# EAGLE board Keg Cop - Daisy Chain (EAGLE 9.6.2)
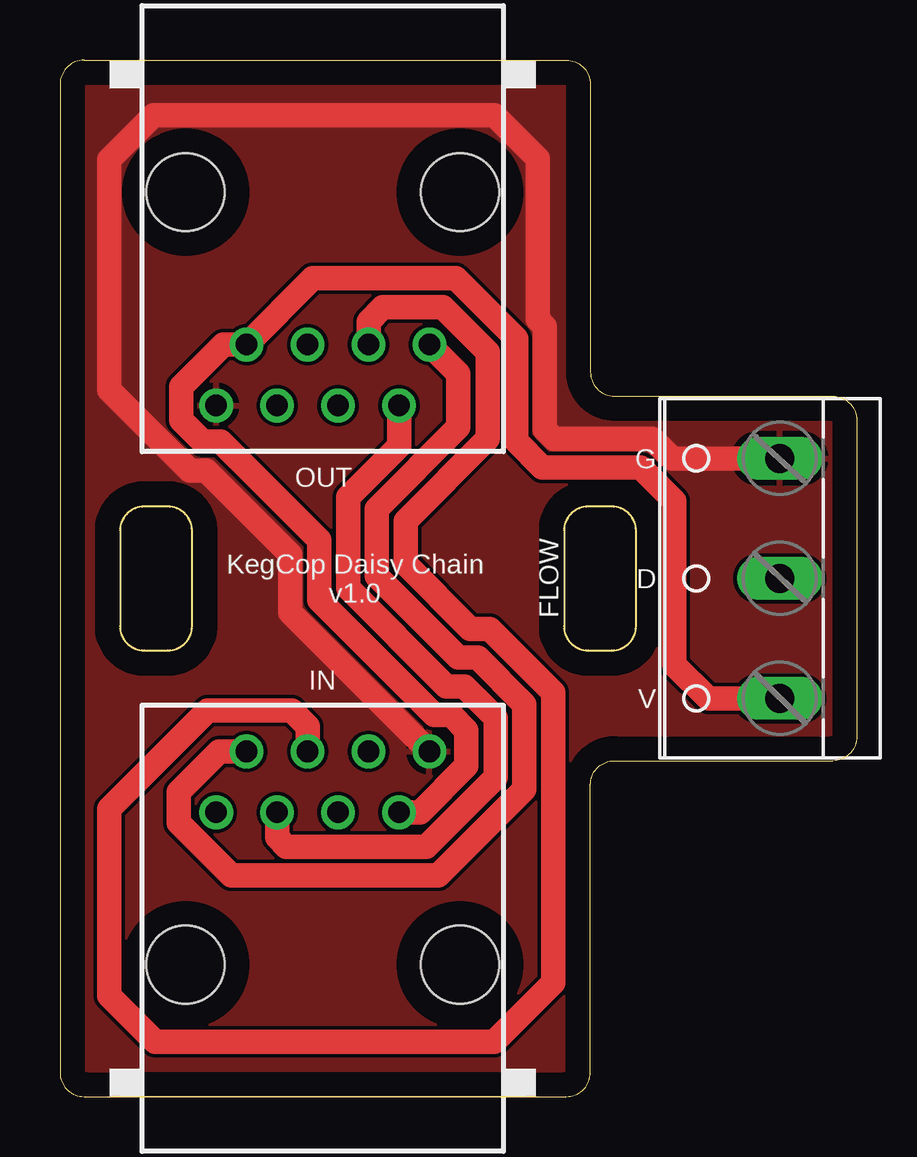
[diagram p0: board, top side]
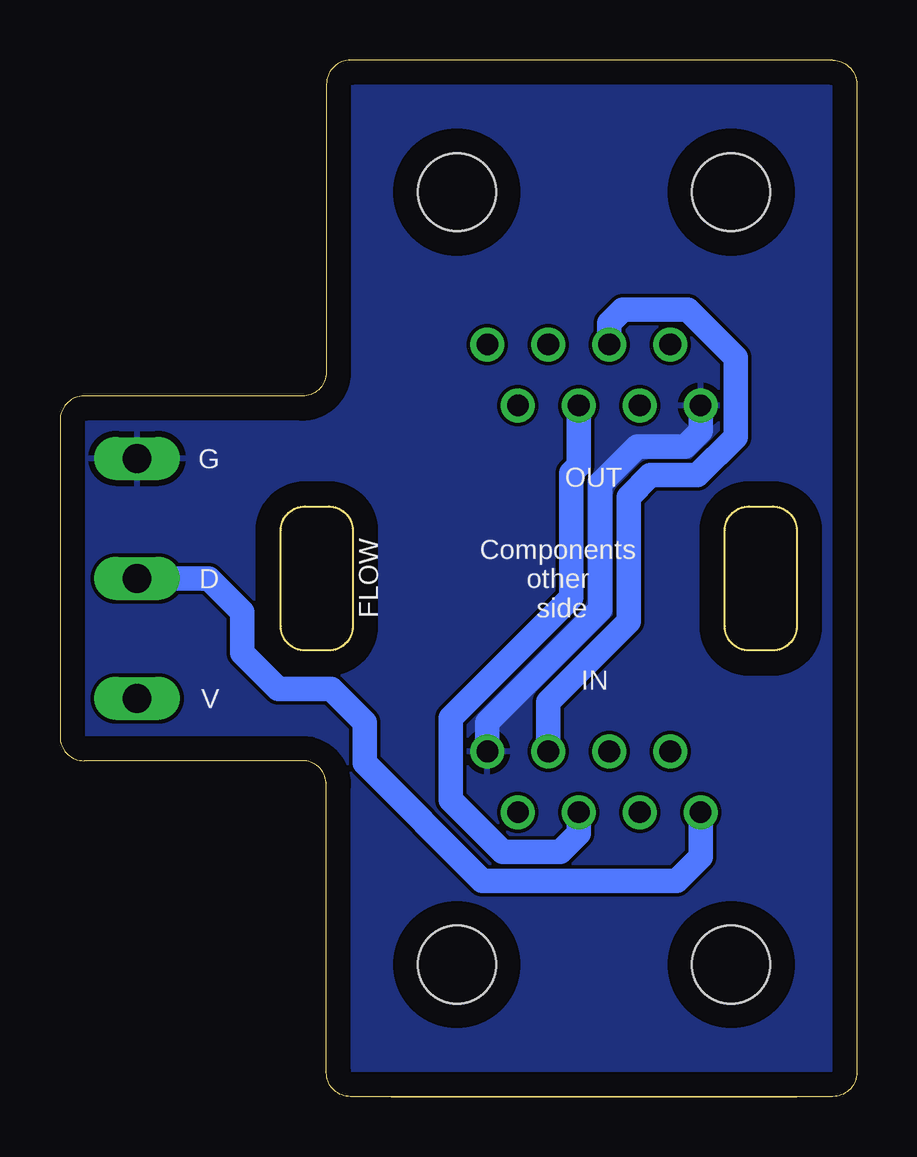
[diagram p1: board, bottom side, seen from below]

Size 33.2 x 43.22 mm. Coordinates in mm from the lower left corner, seen from the top.
Outline: 1,43.21 21.1,43.21 arc-90 22.1,42.21 22.1,30.21 arc90 23.1,29.21 32.2,29.21 arc-90 33.2,28.21 33.2,15.01 arc-90 32.2,14.01 23.1,14.01 arc90 22.1,13.01 22.1,1.01 arc-90 21.1,0.01 1,0.01 arc-90 0,1.01 0,42.21 arc-90 1,43.21
Outline: 4.5,24.61 3.5,24.61 arc90 2.5,23.61 2.5,19.61 arc90 3.5,18.61 4.5,18.61 arc90 5.5,19.61 5.5,23.61 arc90 4.5,24.61
Outline: 22,18.61 23,18.61 arc90 24,19.61 24,23.61 arc90 23,24.61 22,24.61 arc90 21,23.61 21,19.61 arc90 22,18.61
Copper layers (1*16): Top 0.035mm / dielectric 1.5mm / Bottom 0.035mm
Design rules "default": minimum track width 6mil, minimum drill 0.35mm, track to track 6mil, track to pad 6mil, pad to pad 6mil, via to via 6mil, smd to smd 6mil, copper to edge 40mil, drill to drill 6mil, minimum pad ring 10mil, minimum via ring 8mil, stop-mask expansion 4mil, vias tented up to drill 0mil, thermal gap 10mil

## Footprints (pad centres in the part's own frame; a part is rotated, then mirrored left to right if it is on the bottom)
W237-103 = drill 1.194 long: 1 -5,-1.29; 2 0,-1.29; 3 5,-1.29
RJ45-NO-SHIELD = drill 0.9 pad 1.4: 1 -4.445,6.35; 2 -3.175,8.89; 3 -1.905,6.35; 4 -0.635,8.89; 5 0.635,6.35; 6 1.905,8.89; 7 3.175,6.35; 8 4.445,8.89 | hole 3.251: -5.715,0; 5.715,0

## Placement (x,y rotation side)
FLOW  [W237-103]  28.7,21.61 90 top
IN  RJ45-8X  [RJ45-NO-SHIELD]  10.95,5.51 0 top
OUT  RJ45-8X  [RJ45-NO-SHIELD]  10.95,37.71 180 top

## Library data of the parts
FLOW = con-wago-500; MPN: 237-103; OC_FARNELL: unknown; OC_NEWARK: 18M7116
IN OUT = con-tycoelectronics; MPN: RJ45-8X; OC_FARNELL: unknown; OC_NEWARK: 16R6101

## Nets
5V: FLOW.1 IN.7 OUT.7
DATA: FLOW.2 IN.1
GND: FLOW.3 IN.8 OUT.8
N$1: IN.2 OUT.1
N$2: IN.3 OUT.2
N$3: IN.4 OUT.3
N$5: IN.5 OUT.4
N$7: IN.6 OUT.5

## Tracks (layer width: path | path; a pad name or v marks a point on that pad's centre or on a via)
5V
  Top 1.016: IN.7 15,11.86 16.93,13.79 16.93,15.28 16.3,15.91 15.6,15.91 10.8,20.71 10.8,23.21 6.7,27.31 5.95,27.31 5.05,28.21 5.05,29.61 6.8,31.36 OUT.7 10.53,34.12 16.49,34.12 19,31.61 19,27.34 20.1,26.24 24.19,26.24 25.6,24.83 25.6,18.01 27,16.61 FLOW.1
DATA
  Bottom 1.016: IN.1 6.5,10.01 7.5,9.01 15.6,9.01 20.5,13.91 20.5,15.61 21.9,17.01 24.1,17.01 25.6,18.51 25.6,20.21 27,21.61 FLOW.2
GND
  Top 1.016: IN.8 9.6,20.2 9.6,22.62 6.1,26.11 5.4,26.11 2.05,29.46 2.05,39.06 3.9,40.91 18.1,40.91 19.9,39.11 19.9,32.41 20.2,32.11 20.2,27.81 20.6,27.41 24.7,27.41 25.5,26.61 FLOW.3
  Bottom 1.016: OUT.8 6.5,27.76 7.15,27.11 9.15,27.11 10.7,25.56 10.7,20.31 15.39,15.62 IN.8
  pour Top: 21.1,0.01 1,0.01 arc-90 0,1.01 0,42.21 arc-90 1,43.21 21.1,43.21 arc-90 22.1,42.21 22.1,30.21 arc90 23.1,29.21 32.2,29.21 arc-90 33.2,28.21 33.2,15.01 arc-90 32.2,14.01 23.1,14.01 arc90 22.1,13.01 22.1,1.01 arc-90
  pour Bottom: 21.1,0.01 1,0.01 arc-90 0,1.01 0,42.21 arc-90 1,43.21 21.1,43.21 arc-90 22.1,42.21 22.1,30.21 arc90 23.1,29.21 32.2,29.21 arc-90 33.2,28.21 33.2,15.01 arc-90 32.2,14.01 23.1,14.01 arc90 22.1,13.01 22.1,1.01 arc-90
N$1
  Top 1.016: IN.2 6.64,14.4 4.95,12.71 4.95,11.41 7.13,9.23 15.77,9.23 19.35,12.81 19.35,16.36 17.4,18.31 16.6,18.31 13.2,21.71 13.2,24.51 16.6,27.91 16.6,30.16 OUT.1
N$2
  Top 1.016: IN.3 9.04,10.82 9.43,10.43 15.27,10.43 18.15,13.31 18.15,15.8 16.84,17.11 16.1,17.11 12,21.21 12,25.01 14.12,27.14 OUT.2
N$3
  Top 1.016: OUT.3 12.86,32.32 13.45,32.91 15.95,32.91 17.82,31.04 17.82,27.44 14.4,24.01 14.4,22.21 17.1,19.51 17.9,19.51 20.55,16.86 20.55,4.75 18.09,2.29 3.96,2.29 2.04,4.21 2.04,12 6.15,16.11 9.65,16.11 10.31,15.45 IN.4
N$5
  Bottom 1.016: IN.5 11.59,10.98 12.35,10.21 14.75,10.21 16.93,12.39 16.93,15.79 11.9,20.81 11.9,26.01 11.59,26.33 OUT.4
N$7
  Bottom 1.016: OUT.5 10.31,32.25 9.75,32.81 7.05,32.81 5.05,30.81 5.05,27.51 6.65,25.91 8.6,25.91 9.5,25.01 9.5,19.81 12.86,16.46 IN.6

## Text on the board
tNames: G | KegCop Daisy Chain / v1.0 | D | V
bNames: G | OUT | Components / other / side | FLOW | D | IN | V